# Altium PCB Speedometer.PcbDoc
Units mm, origin at the board's own origin, x right, y up, seen from the top; angles counter-clockwise.
Board outline 314 x 108.5 mm, 2 copper layers (Top Layer, Bottom Layer); 32 components, 55 nets, 295 pads, 0 vias.
Unrouted connection lines stored in the file: 96.
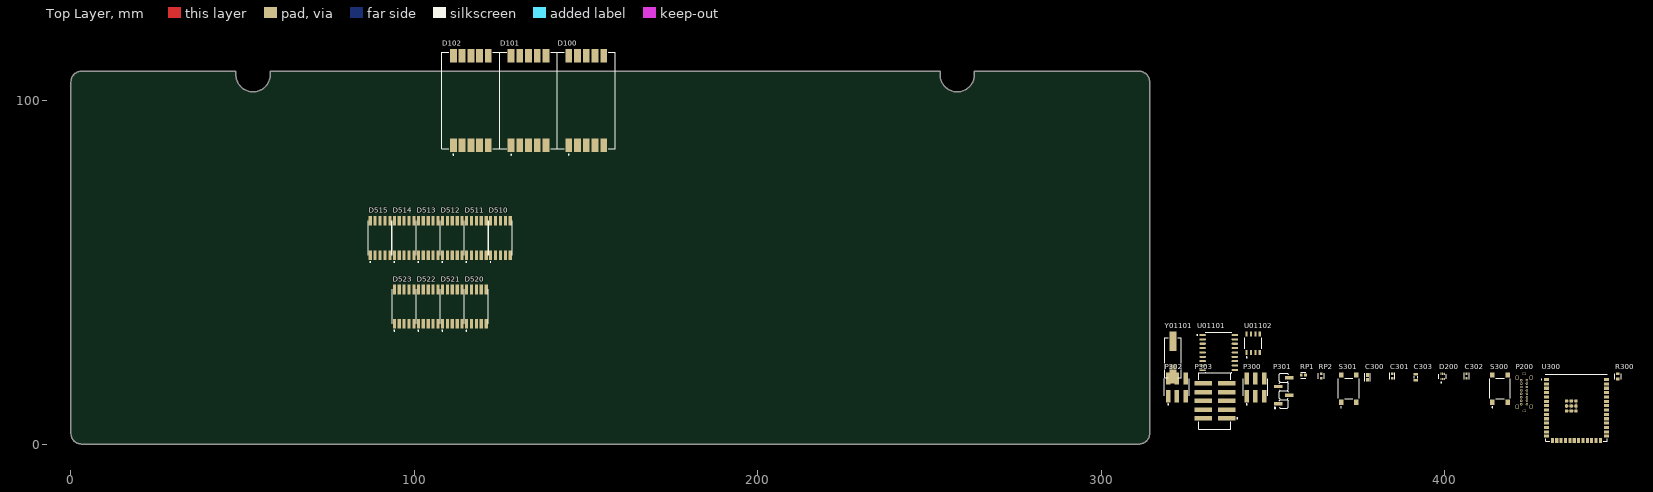
[diagram p0: Top Layer view]
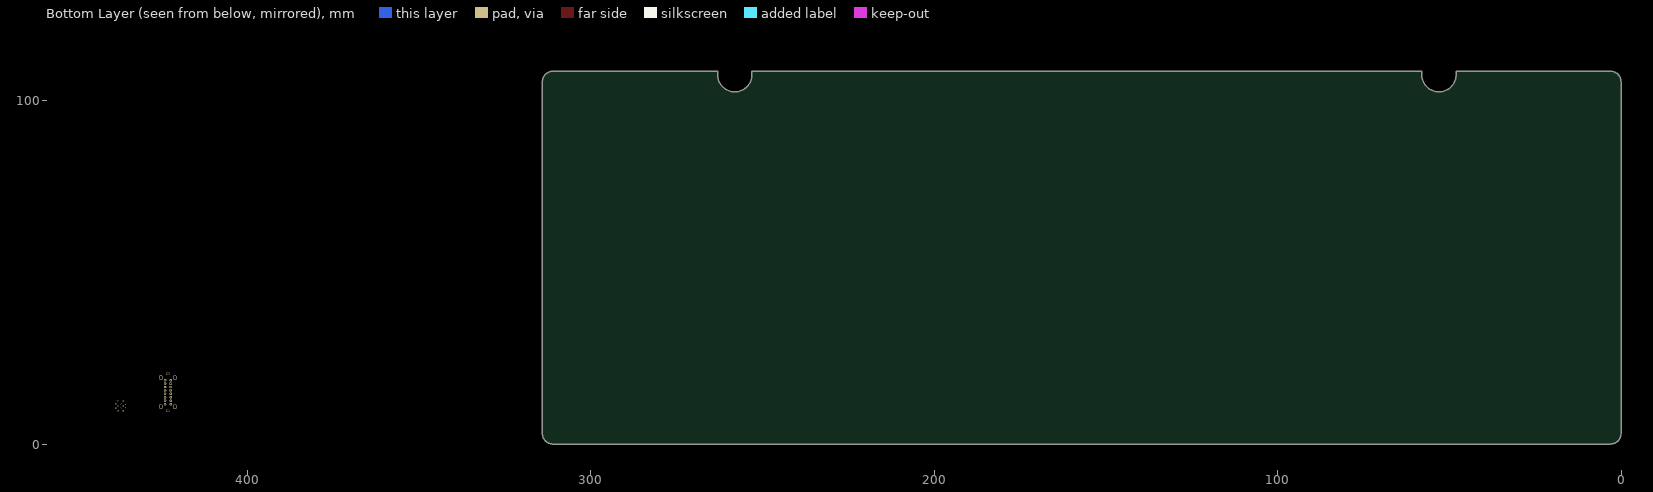
[diagram p1: Bottom Layer view, seen from below]

## Layer stack, top to bottom
Top Solder: solder mask 0.0102, Solder Resist, Dk 3.5
Top Layer: signal copper 0.0356
Dielectric 1: dielectric 0.32, FR-4, Dk 4.8
Bottom Layer: signal copper 0.0356
Bottom Solder: solder mask 0.0102, Solder Resist, Dk 3.5

## Board outline
0,3 ccw(c3,3) 3,0 311.068,0 311,0 ccw(c311,3) 314,3 314,105.5 ccw(c311,105.5) 311,108.5 263,108.5 263,107.528 cw(c258,107.528) 253,107.528 253,108.5 58,108.5 58,107.51 cw(c53,107.51) 48,107.51 48,108.484 3.016,108.484 3,108.5 ccw(c3,105.5) 0,105.5 0,105.51

## Design rules (kind name [scope] priority, off if disabled: settings)
Clearance [All] p1: gap=0.254 ignorepadtopadclearanceinfootprint=FALSE
PolygonConnect [All] p1: connectstyle=Relief reliefconductorwidth=0.254 reliefentries=4 polygonreliefangle="90 Angle" airgapwidth=0.254
RoutingVias [All] p1: holewidth=0.711 width=1.27 viastyle="Through Hole" minholewidth=0.711 minwidth=1.27 maxholewidth=0.711 maxwidth=1.27
SolderMaskExpansion [All] p1: expansion=0.102 istentingtop=FALSE
Width [All] p1: maxlimit=0.254 minlimit=0.254 preferedwidth=0.254
30 further rules are at their usual default settings.

## Classes and differential pairs
component class 90_CAN: C0101 C01101 C01102 C01103 C01104 C01105 L0101 Q0101 R0105 R0106 R01101 U01101 U01102 Y01101
component class 10_Speed: D100 D101 D102
component class 110_ESP32s3: C300 C301 C302 C303 D200 P200 P300 P301 P302 P303 R300 RP1 RP2 S300 S301 U300
component class 50_Distance: D510 D511 D512 D513 D514 D515 D520 D521 D522 D523

## Components (designator, comment, footprint, x,y, rotation, side; value= is the part's Value field where it differs from the comment)
C300 "GMK107BJ104KAHT" FP-0603-L_1_6_0_1-W_0_8_0-IPC_B 377.444,19.42 r90 top
C301 "1uF" FP-CGA3E-0_3-0_1-MFG 384.683,19.801 r90 top
C302 "1uF" FP-CGA3E-0_3-0_1-MFG 406.273,19.801 r90 top
C303 "Capacitor 22µF +/-40% 16V 0805" CAPC0805(2012)145_L 391.541,19.42 r90 top value=22µF
D100 "28mm 7-Segment" GS8011AR-G 150,100 r0 top
D101 "28mm 7-Segment" GS8011AR-G 133.2,100 r0 top
D102 "28mm 7-Segment" GS8011AR-G 116.4,100 r0 top
D200 "TPD2E1B06DRLR" FP-DRL0006A-MFG 399.288,19.674 r90 top
D510 "10mm 7-Segment" GS2011AG-G 125,60 r0 top
D511 "10mm 7-Segment" GS2011AG-G 118,60 r0 top
D512 "10mm 7-Segment" GS2011AG-G 111,60 r0 top
D513 "10mm 7-Segment" GS2011AG-G 104,60 r0 top
D514 "10mm 7-Segment" GS2011AG-G 97,60 r0 top
D515 "10mm 7-Segment" GS2011AG-G 90,60 r0 top
D520 "10mm 7-Segment" GS2011AG-G 118,40 r0 top
D521 "10mm 7-Segment" GS2011AG-G 111,40 r0 top
D522 "10mm 7-Segment" GS2011AG-G 104,40 r0 top
D523 "10mm 7-Segment" GS2011AG-G 97,40 r0 top
P200 "TYPEC-300D-BCP16H100" TYPEC-300D-BCP16H100-Footprint-1 423.037,15.102 r90 top
P300 "5-146130-2" TECO-5-146130-2_V 344.805,16.499 r0 top
P301 "M20-8770442R" HARWIN_M20-8770442R 353.06,15.483 r90 top
P302 "5-146130-2" TECO-5-146130-2_V 321.945,16.499 r0 top
P303 "HTSS-105-01-L-DV" SMTC-HTSS-105-01-X-DV 332.994,12.562 r90 top
R300 "1kΩ" FP-CRCW0603-e3-MFG 450.342,19.674 r90 top
RP1 "CRCW06035K10FKEA" FP-CRCW0603-e3-IPC_C 358.775,20.055 r0 top
RP2 "CRCW06035K10FKEA" FP-CRCW0603-e3-IPC_C 363.982,19.801 r90 top
S300 "" FP-PTS645SM43SMTR92LFS-MFG 416.052,16.118 r90 top
S301 "" FP-PTS645SM43SMTR92LFS-MFG 371.983,16.118 r90 top
U300 "ESP32WroomS3" ESP32WroomS3 429.514,18.785 r0 top
U01101 "MCP2515-I/SO" FP-C04-051-MFG 334.137,26.659 r0 top
U01102 "MCP2562FDT-E/SN" FP-C04-057-SN-MFG 344.17,29.326 r90 top
Y01101 "ABLS-16.000MHZ-K4T" FP-ABLS-MFG 320.802,25.135 r90 top

## Footprints (in the part's own frame and the unit in brackets; to place one, negate y for a bottom-side part, rotate by r counter-clockwise, add the part's x,y. Pads: shape width x height; smd on the part's side, far side on the other; paste and mask are expansions set on the pad)
CAPC0805(2012)145_L [mm] "Chip Capacitor, Body 2.0x1.2mm, Height 1.45mm, IPC High Density"
  rrect25% 0.76x1.3 smd: 1(-0.9,0) 2(0.89,0)
  silkscreen extent -0.3,-0.55 0.3,0.55, body extent -1,-0.6 1,0.6, height 1.45
ESP32WroomS3 [mm]
  rect 1.5x0.9 smd: 1(0,0) 2(0,-1.27) 3(0,-2.54) 4(0,-3.81) 5(0,-5.08) 6(0,-6.35) 7(0,-7.62) 8(0,-8.89) 9(0,-10.16) 10(0,-11.43) 11(0,-12.7) 12(0,-13.97) 13(0,-15.24) 14(0,-16.51) 27(17.5,-16.51) 28(17.5,-15.24) 29(17.5,-13.97) 30(17.5,-12.7) 31(17.5,-11.43) 32(17.5,-10.16) 33(17.5,-8.89) 34(17.5,-7.62) 35(17.5,-6.35) 36(17.5,-5.08) 37(17.5,-3.81) 38(17.5,-2.54) 39(17.5,-1.27) 40(17.5,0)
  rect 0.9x1.5 smd: 15(1.765,-17.76) 16(3.035,-17.76) 17(4.305,-17.76) 18(5.575,-17.76) 19(6.845,-17.76) 20(8.115,-17.76) 21(9.385,-17.76) 22(10.655,-17.76) 23(11.925,-17.76) 24(13.195,-17.76) 25(14.465,-17.76) 26(15.735,-17.76)
  rect 0.9x0.9 smd: 41(5.85,-9.12) 41(5.85,-7.72) 41(5.85,-6.32) 41(7.25,-9.12) 41(7.25,-7.72) 41(7.25,-6.32) 41(8.65,-9.12) 41(8.65,-7.72) 41(8.65,-6.32)
  round 0.4 hole 0.2 mask+0: 41(5.85,-8.42) 41(5.85,-7.02) 41(6.55,-9.12) 41(6.55,-7.72) 41(6.55,-6.32) 41(7.25,-8.42) 41(7.25,-7.02) 41(7.95,-9.12) 41(7.95,-7.72) 41(7.95,-6.32) 41(8.65,-8.42) 41(8.65,-7.02)
  silkscreen extent -1.55,-18.01 17.78,1.52, body extent -0.24,-17.98 17.76,1.22, height 3.35
FP-0603-L_1_6_0_1-W_0_8_0-IPC_B [mm]
  rect 1.058x0.912 smd paste+0 mask+0: 1(-0.677,0) 2(0.677,0)
  silkscreen extent -1.21,-0.86 1.21,0.86, body extent -1.46,-0.71 1.46,0.71, height 0.25
FP-ABLS-MFG [mm]
  rect 5.6x2.1 smd paste+0 mask+0: 1(-4.75,0) 2(4.75,0)
  silkscreen extent -5.77,-2.42 5.77,2.42, body extent -7.65,-2.52 7.65,2.52, height 0.25
FP-C04-051-MFG [mm]
  rrect100% 1.9x0.6 smd paste+0 mask+0: 1(-4.7,5.08) 2(-4.7,3.81) 3(-4.7,2.54) 4(-4.7,1.27) 5(-4.7,0) 6(-4.7,-1.27) 7(-4.7,-2.54) 8(-4.7,-3.81) 9(-4.7,-5.08) 10(4.7,-5.08) 11(4.7,-3.81) 12(4.7,-2.54) 13(4.7,-1.27) 14(4.7,0) 15(4.7,1.27) 16(4.7,2.54) 17(4.7,3.81) 18(4.7,5.08)
  silkscreen extent -6.42,-5.87 3.8,5.87, body extent -5.75,-6.12 5.75,6.12, height 0.25
FP-C04-057-SN-MFG [mm]
  rect 1.55x0.6 smd paste+0 mask+0: 1(-2.7,1.905) 2(-2.7,0.635) 3(-2.7,-0.635) 4(-2.7,-1.905) 5(2.7,-1.905) 6(2.7,-0.635) 7(2.7,0.635) 8(2.7,1.905)
  silkscreen extent -4.22,-2.5 1.55,2.5, body extent -3.57,-2.75 3.57,2.75, height 0.25
FP-CGA3E-0_3-0_1-MFG [mm]
  rect 0.7x0.7 smd paste+0 mask+0: 1(-0.7,0) 2(0.7,0)
  silkscreen extent -0.95,-0.72 0.95,0.72, body extent -1.15,-0.65 1.15,0.65, height 0.25
FP-CRCW0603-e3-IPC_C [mm]
  rect 0.735x0.862 smd paste+0 mask+0: 1(-0.615,0) 2(0.615,0)
  silkscreen extent -0.75,-0.85 0.75,0.85, body extent -1.08,-0.58 1.08,0.58, height 0.25
FP-CRCW0603-e3-MFG [mm]
  rect 0.75x1 smd paste+0 mask+0: 1(-0.75,0) 2(0.75,0)
  silkscreen extent -0.8,-0.9 0.8,0.9, body extent -1.22,-0.6 1.22,0.6, height 0.25
FP-DRL0006A-MFG [mm]
  rrect33% 0.67x0.3 smd paste+0 mask+0: 1(-0.74,0.5) 2(-0.74,0) 3(-0.74,-0.5) 4(0.74,-0.5) 5(0.74,0) 6(0.74,0.5)
  silkscreen extent -1.9,-1.05 0.65,1.05, body extent -1.17,-1.1 1.17,1.1, height 0.25
FP-PTS645SM43SMTR92LFS-MFG [mm]
  rect 1.55x1.3 smd paste+0 mask+0: 1(-3.975,2.25) 2(3.975,2.25) 3(-3.975,-2.25) 4(3.975,-2.25)
  silkscreen extent -5.52,-3 3,3, body extent -4.85,-3.1 4.85,3.1, height 0.25
GS2011AG-G [mm]
  rect 0.9x2.8 smd: 1(-2.88,-5) 2(-1.44,-5) 4(1.44,-5) 5(2.88,-5) 6(2.88,5) 7(1.44,5) 9(-1.44,5) 10(-2.88,5) A(0,-5) A(0,5)
  silkscreen extent -3.45,-7.13 3.45,5, body extent -3.45,-5 3.45,5, height 3
GS8011AR-G [mm]
  rect 2x4 smd: 1(-5.08,-13) 2(-2.54,-13) 4(2.54,-13) 5(5.08,-13) 6(5.08,13) 7(2.54,13) 9(-2.54,13) 10(-5.08,13) A(0,-13) A(0,13)
  silkscreen extent -8.4,-15.88 8.4,14, body extent -8.38,-13.97 8.38,13.97, height 3.75
HARWIN_M20-8770442R [mm]
  rect 1x2.51 smd: 1(-3.81,1.655) 2(-1.27,-1.655) 3(1.27,1.655) 4(3.81,-1.655)
  silkscreen extent -5.18,-1.25 5.08,2.76
SMTC-HTSS-105-01-X-DV [mm] "High Temp Top Shroud, 2x5 Pins, Vertical, 2.54mm Pitch, Male"
  rect 1.27x5.08 smd: 1(-5.08,-3.43) 2(-5.08,3.43) 3(-2.54,-3.43) 4(-2.54,3.43) 5(0,-3.43) 6(0,3.43) 7(2.54,-3.43) 8(2.54,3.43) 9(5.08,-3.43) 10(5.08,3.43)
  silkscreen extent -8.25,-6.65 8.25,4.63, body extent -8.25,-5.59 8.25,5.59, height 10.16
TECO-5-146130-2_V [mm] "Header, 6-Leads, Body 7.21x4.88mm, Pitch 2.54mm"
  rect 1.27x3.56 smd: 1(-2.54,-2.605) 2(-2.54,2.605) 3(0,-2.605) 4(0,2.605) 5(2.54,-2.605) 6(2.54,2.605)
  silkscreen extent -3.6,-5.06 3.6,2.44, body extent -3.61,-3.77 3.61,3.64, height 9.74
TYPEC-300D-BCP16H100-Footprint-1 [mm]
  round 0.7 hole 0.4: A1(-3.5,0.83) A4(-2.5,0.83) A5(-1.5,0.83) A6(-0.5,0.83) A7(0.5,0.83) A8(1.5,0.83) A9(2.5,0.83) A12(3.5,0.83) B1(3.5,-0.82) B4(2.5,-0.82) B5(1.5,-0.82) B6(0.5,-0.82) B7(-0.5,-0.82) B8(-1.5,-0.82) B9(-2.5,-0.82) B12(-3.5,-0.82)
  round 0.9 hole 0.9 unplated: M(-5.4,0) M(5.4,0)
  oval 1.4x1 hole 0.6 slot 1 at 0 deg: M_GND(-4.225,-2.02) M_GND(-4.225,2.02) M_GND(4.225,-2.02) M_GND(4.225,2.02)

## Part data
C300: library part CMP-14477-002194-3, "Ceramic Capacitor Automotive 0.1uF ±10% 35V X5R 0603", Capacitance=100nF, Case Code (Imperial)=0603, Case Code (Metric)=1608, Dielectric=X5R, Max Operating Temperature=85°C, Min Operating Temperature=-55°C, Ratings=AEC-Q200, Tolerance=10%, Voltage Rating=35V, Case/Package=0603, Halogen Free="Halogen Free", Height=900µm, Lead Free="Lead Free", Length=1.6002mm, Material=Ceramic, Max Length=1.7mm, Max Thickness=900µm, Max Width=900µm, Min Length=1.5mm, Min Thickness=700µm, Min Width=700µm, Mount="Surface Mount", NexarPartId=29103042, Packaging=Digi-Reel®, RoHS=Compliant, Termination=SMD/SMT, Thickness=889µm, Voltage Rating (DC)=35V, Width=800µm
C301 C302: library part CMP-08246-002551-1, "Cap Ceramic 1uF 35V X7R 10% Pad SMD 0603 +125°C Automotive T/R / CGA3E1X7R1V105K080AC", Case Code (Imperial)=0603, Case Code (Metric)=1608, Dielectric=X7R, Max Operating Temperature=125°C, Min Operating Temperature=-55°C, Package Quantity=4000, Ratings=AEC-Q200, Tolerance=10%, Voltage Rating=35V, Capacitance=1uF, Case/Package=0603, Height=0.8mm, Length=0.063inch, Mount="Surface Mount", Packaging="Tape and Reel", Termination=SMD/SMT, Thickness=0.035inch, Voltage Rating (DC)=35V, Weight=7.1E-05oz, Width=0.031inch
C303: library part CMP-001-00081-4, "Chip Capacitor, 22µF +/-40%, 16V, 0805, Thickness 1.45 mm", Case/Package=0805, Max Operating Temperature=85°C, Min Operating Temperature=-55°C, Tolerance=5%, Voltage Rating=16V, Mounting Technology=SMT, Pins=2
D100 D101 D102: library part GS8011AR-G, "SMD, 28x16.8mm 7-Segment"
D200: library part CMP-04985-000003-1, "TVS DIODE 5.5V 15V 6SOT", Ambient Temperature Range High=+125°C, Ambient Temperature Range Low=-40°C, Breakdown Voltage=7V, Clamping Voltage=15V, Manufacturer="Texas Instruments", Package=DRL0006A, Peak Pulse Current=2.5A, Peak Pulse Power=35W, Reverse Standoff Voltage=5.5V, Temperature="-40°C to +125°C", Automotive=No, Category=Diode, ComponentLink2Description=Datasheet, ComponentLink2URL=http://www.ti.com/lit/ds/symlink/tpd2e1b06.pdf, Device Class L1="Circuit Protection", Device Class L2="ESD and Circuit Protection ICs", Device Class L3=unset, Digikey Description="TVS DIODE 5.5V 15V 6SOT", Direction=Bidirectional, Height=0.6mm, Interface=I2C,USB,LVDS,Other, Lead Free=Yes, Manufacturer Part Number=TPD2E1B06DRLR, Mouser Description="ESD Suppressors / TVS Diodes 2-CH system level ESD protect device", Number Of Channels=2, Octopart=https://octopart.com/tpd2e1b06drlr-texas+instruments-30488860, RoHS=TRUE, Standoff Height=0mm, Temperature Range High=+125°C, Temperature Range Low=-40°C
D510 D511 D512 D513 D514 D515 D520 D521 D522 D523: library part GS2011AG-G, "SMD, 10x6.9mm 7-Segment"
P200: library part CMP-002-00081-3, "Vertical USB Type C Connector"
P300 P302: library part CMP-1684-00011-1, "Male Header, Pitch 2.54 mm, 2 x 3 Position, Height 8.13 mm, -65 to 125 degC, RoHS, Tube", Max Operating Temperature="150 degC", Max Supply Voltage="5.5 V", Min Operating Temperature="-40 degC", Min Supply Voltage="4.5 V", Nominal Supply Voltage="5 V", Package Quantity=3000, ComponentLink1Description="Manufacturer URL", ComponentLink1URL=http://www.te.com/, ComponentLink2Description=Datasheet, ComponentLink2URL=http://www.te.com/commerce/DocumentDelivery/DDEController?Action=showdoc&DocId=Customer+Drawing%7F146130%7FM%7Fpdf%7FEnglish%7FENG_CD_146130_M.pdf%7F5-146130-2, DatasheetVersion=Oct-15, Mount="Surface Mount", PackageDescription="Male Header, Pitch 2.54 mm, 2 x 3 Position, Height 8.13 mm", PackageReference=5-146130-2, Packaging="Tape and Reel", Pins=3, Radiation Hardening=No, RoHSCompliant=true
P301: "Connector Header Surface Mount 4 position 0.100 (2.54mm)", Package=None, Availability="In Stock", Check_prices=https://www.snapeda.com/parts/M20-8770442R/Harwin+Inc./view-part/?ref=eda, MF="Harwin Inc.", MP=M20-8770442R, Price=None, Purchase-URL=https://pricing.snapeda.com/search?q=M20-8770442R&ref=eda, SnapEDA_Link=https://www.snapeda.com/parts/M20-8770442R/Harwin+Inc./view-part/?ref=snap
P303: library part CMP-1024-00042-1, "Shrouded .025\" SQ Post Header, Surface Mount, Vertical, -55 to 125 degC, 2.54 mm Pitch, 10-Pin, Male, RoHS", Manufacturer=Samtec, Temperature Range="-55 to 125 degC", ComponentLink1Description="Manufacturer URL", ComponentLink1URL=http://www.samtec.com, ComponentLink2Description=Datasheet, ComponentLink2URL=http://www.samtec.com/documents/webfiles/pdf/htss.pdf, ComponentLink3Description="Package Specification", ComponentLink3URL=http://www.samtec.com/documents/webfiles/cpdf/HTSS-1XX-01-XX-DV-X-XX-X-XX-MKT.pdf, DatasheetVersion=F-214, Mounting Technology="Surface Mount", Orientation=Vertical, PackageDescription="High Temp Top Shroud", PackageReference=HTSS-105-01-X-DV, PackageVersion="Z, 7/2001", PartNumber=HTSS-105-01-L-DV, Pitch="2.54 mm", RoHS=True
R300: library part CMP-1666-00003-5, "RES Thick Film, 1kΩ, 1%, 0.1W, 100ppm/°C, 0603, CRCW06031K00FKEA", Case Code (Imperial)=0603, Case Code (Metric)=1608, Max Operating Temperature=155°C, Max Power Dissipation=100mW, Min Operating Temperature=-55°C, Package Quantity=10, Resistance=1kR, Temperature Coefficient=100ppm/°C, Tolerance=1%, Voltage Rating=75V, Case/Package=0603, Composition="Thick Film", Contact Plating=Tin, Depth=0.85mm, Features="Automotive AEC-Q200", Height=0.45mm, Lead Free="Lead Free", Length=1.55mm, Military Standard=Not, Mount="Surface Mount", Number of Pins=2, Number of Terminations=2, Packaging="Tape and Reel", Power Rating=100mW, Radiation Hardening=No, Termination=SMD/SMT, Voltage Rating (DC)=75V, Weight=7.1E-05oz, Width=0.033inch
RP1 RP2: library part CMP-1012-00590-3, "RES Thick Film, 5.1kΩ, 1%, 0.1W, 100ppm/°C, 0603", Case Code (Imperial)=0603, Case Code (Metric)=1608, Max Operating Temperature=155°C, Min Operating Temperature=-55°C, Package Quantity=5000, Power Rating=100mW, Resistance=5.1kR, Temperature Coefficient=100ppm/°C, Tolerance=1%, Voltage Rating=75V, Case/Package=0603, Composition="Thick Film", Contact Plating=Tin, Depth=0.85mm, Height=0.45mm, Lead Free="Lead Free", Length=1.55mm, Military Standard=Not, Mount="Surface Mount", Packaging="Tape and Reel", Radiation Hardening=No, Termination=SMD/SMT, Voltage Rating (DC)=75V, Weight=7.1E-05oz, Width=0.85mm
S300 S301: library part CMP-2000-05160-2, "SWITCH TACTILE SPST-NO 0.05A 12V / PTS645SM43SMTR92LFS", Case/Package=SMD/SMT, Color=Black, Contact Resistance=100mR, Current Rating=50mA, Max Operating Temperature=60°C, Max Voltage Rating (DC)=12V, Min Operating Temperature=-20°C, Operating Force=160gf, Package Quantity=1, Actuator Length=0.85mm, Actuator Material=Nylon, Actuator Type=Standard, Contact Material=Silver, Contact Plating=Silver, Depth=9mm, Illumination Type=Non-Illuminated, Lead Free="Lead Free", Length=6mm, Max Current Rating=50mA, Mechanical Life=100000Cycles, Mount="Surface Mount", Orientation=Straight, Packaging="Tape and Reel", REACH SVHC="No SVHC", Switch Function=Off-Mom, Termination="Gull Wing", Throw Configuration=SPST, Voltage Rating (DC)=12V
U300: library part CMP-017-000002-1, Design Item ID=ESP32WroomS3, Source=Schaltdose.SchLib
U01101: library part CMP-0186-00133-3, "IC CAN CONTROLLER W/SPI 18SOIC", Ambient Temperature Range High=+125°C, Ambient Temperature Range Low=-65°C, Manufacturer=Microchip, Max Supply Voltage=5.5V, Min Supply Voltage=2.7V, Nominal Supply Current=10mA, Package=C04-051, Temperature="-40°C to +85°C", Temperature Range High=+85°C, Temperature Range Low=-40°C, Automotive=No, Category=IC, ComponentLink2Description=Datasheet, ComponentLink2URL=http://ww1.microchip.com/downloads/en/DeviceDoc/MCP2515-Stand-Alone-CAN-Controller-with-SPI-20001801J.pdf, Device Class L1="Integrated Circuits (ICs)", Device Class L2="Interface ICs", Device Class L3=Controllers, Digikey Description="IC CAN CONTROLLER W/SPI 18SOIC", Footprint Url=http://ww1.microchip.com/downloads/en/DeviceDoc/18L_SOIC_Wide_7.50_SO_C04-0051D.pdf, Function=Controller, Height=2.65mm, Interface=SPI,CAN, Ipc Land Pattern Name=SOIC127P1030X265-18, Lead Free=Yes, Manufacturer Part Number=MCP2515-I/SO, Mouser Description="CAN Interface IC W/ SPI Interface", Octopart=https://octopart.com/mcp2515-i%2Fso-microchip-430187, RoHS=TRUE, Standoff Height=0.1mm
U01102: library part CMP-06279-000005-1, "IC TRANSCEIVER 1/1 8SOIC", Case/Package=SOIC, Max Operating Temperature=125°C, Max Supply Voltage=5.5V, Min Operating Temperature=-40°C, Min Supply Voltage=4.5V, Operating Supply Current=70mA, Package Quantity=3300, Data Rate=8Mbps, Mount="Surface Mount", Number of Pins=8, Number of Transceivers=1, Packaging="Tape and Reel", Receiver Hysteresis=200mV, Weight=0.019048oz
Y01101: library part CMP-27762-000003-1, "CRYSTAL 16.0000MHZ 18PF SMD", Frequency=16MHz, Load Capacitance=18pF, Manufacturer=Abracon, Package=ABLS, Temperature="-40°C to +125°C", Temperature Range High=+125°C, Temperature Range Low=-40°C, Tolerance=30ppm, Automotive=No, Category=Crys, ComponentLink2Description=Datasheet, ComponentLink2URL=https://abracon.com/Resonators/abls.pdf, Device Class L1="Passive Components", Device Class L2="Crystals / Oscillators", Device Class L3=Crystals, Digikey Description="CRYSTAL 16.0000MHZ 18PF SMD", Esr=40Ω, Height=4.3mm, Lead Free=Yes, Manufacturer Part Number=ABLS-16.000MHZ-K4T, Mouser Description="Crystal 16MHz ±30ppm (Tol) ±50ppm (Stability) 18pF FUND 40Ohm 2-Pin HC-49/US SMD T/R", Octopart=https://octopart.com/abls-16.000mhz-k4t-abracon-18618626, RoHS=TRUE, Series=ABLS, Stability=50ppm, Standoff Height=0mm

## Nets (pads, with @x,y where several pads share a name; then routed paths per layer and width w, separated by ;. In a path a pad name is that pad's centre, name@x,y a point inside that pad or via, vN(x,y) a via of type N, cw(c..) or ccw(c..) an arc to the next point about the centre after c; other vN are vias at no path point)
3V3: C302.1 C303.2 P302.2 P303.1 R300.1 U300.2 U01101.18 U01102.5
5V: P200.A4 P200.A9 P200.B4 P200.B9 P300.1 P302.1 U01102.3
CAN_H: U01102.7
CAN_L: U01102.6
CS1: U300.19
CS2: U300.20
CS3: U300.21
CS4: U300.22
CS5: U300.8
CS6: U300.9
CS7: U300.10
CS8: U300.11
CSE1: U300.17
CSE2: U300.18
EN: C301.1 P300.4 P301.3 P303.10 R300.2 S300.3 U300.3
GND: C301.2 C302.2 C303.1 D200.2 D200.3 D200.4 D200.6 P200.A1 P200.A12 P200.B1 P200.B12 P200.M_GND P300.5 P300.6 P301.4 P302.4 P302.6 P303.3 P303.5 P303.9 RP1.2 RP2.2 S300.1 S301.1 U300.1 U300.40 U300.41 U01101.9 U01102.2 U01102.8
K1: U300.4
K2: U300.5
K3: U300.6
K4: U300.7
K5: U300.12
K6: U300.28
K7: U300.29
K8: U300.30
MISO: U01101.15
MOSI: U01101.14
MTCK: P303.4 U300.32
MTDI: P303.8 U300.34
MTDO: P303.6 U300.33
MTMS: P303.2 U300.35
NetC0101_1: 
NetC300_1: C300.1 S300.4
NetC300_2: C300.2 S300.2
NetC01102_2: U01101.8 Y01101.1
NetC01103_2: U01101.7 Y01101.2
NetL0101_1: 
NetL0101_2: 
NetP200_A5: P200.A5 RP1.1
NetP200_B5: P200.B5 RP2.1
NetR01101_1: U01101.17
NetS301_3: S301.3 U300.27
NetU01101_12: U01101.12
NetU01101_16: U01101.16
RX: P300.3 P301.2 U300.36
RXCAN: U01101.2 U01102.4
SCL: P302.5 U300.38
SCLK: U01101.13
SDA: P302.3 U300.39
SigERR: U300.31
SigStat: U300.25
SigWlan: U300.24
TX: P300.2 P301.1 U300.37
TXCAN: U01101.1 U01102.1
"USB D+": D200.5 P200.A6 P200.B6 U300.14
"USB D-": D200.1 P200.A7 P200.B7 U300.13
pads on no net: D100.1 D100.2 D100.4 D100.5 D100.6 D100.7 D100.9 D100.10 D100.A D101.1 D101.2 D101.4 D101.5 D101.6 D101.7 D101.9 D101.10 D101.A D102.1 D102.2 D102.4 D102.5 D102.6 D102.7 D102.9 D102.10 D102.A D510.1 D510.2 D510.4 D510.5 D510.6 D510.7 D510.9 D510.10 D510.A D511.1 D511.2 D511.4 D511.5 D511.6 D511.7 D511.9 D511.10 D511.A D512.1 D512.2 D512.4 D512.5 D512.6 D512.7 D512.9 D512.10 D512.A D513.1 D513.2 D513.4 D513.5 D513.6 D513.7 D513.9 D513.10 D513.A D514.1 D514.2 D514.4 D514.5 D514.6 D514.7 D514.9 D514.10 D514.A D515.1 D515.2 D515.4 D515.5 D515.6 D515.7 D515.9 D515.10 D515.A D520.1 D520.2 D520.4 D520.5 D520.6 D520.7 D520.9 D520.10 D520.A D521.1 D521.2 D521.4 D521.5 D521.6 D521.7 D521.9 D521.10 D521.A D522.1 D522.2 D522.4 D522.5 D522.6 D522.7 D522.9 D522.10 D522.A D523.1 D523.2 D523.4 D523.5 D523.6 D523.7 D523.9 D523.10 D523.A P200.A8 P200.B8 P200.M P303.7 S301.2 S301.4 U300.15 U300.16 U300.23 U300.26 U01101.3 U01101.4 U01101.5 U01101.6 U01101.10 U01101.11

## Silkscreen, mask and mechanical layers (free items; w line width, h text height)
Mechanical 1:
  lines w0.254: 0,105.5 cw(c3,105.5) 3,108.5 ; 0,105.51 0,3 ccw(c3,3) 3,0 ; 3.016,108.484 48,108.484 48,107.51 ccw(c53,107.51) 58,107.51 58,108.482 ; 3.061,0 311.068,0 ; 58,108.5 253,108.5 ; 253,108.502 253,107.528 ccw(c258,107.528) 263,107.528 263,108.5 311,108.5 cw(c311,105.5) 314,105.5 314,2.932 ; 311,0 ccw(c311,3) 314,3